# Altium PCB Syn_buckconverter_Altium.PcbDoc
Units mil, origin at the board's own origin, x right, y up, seen from the top; angles counter-clockwise.
Board outline 6000 x 4000 mil, 2 copper layers (Top Layer, Bottom Layer); 7 components, 7 nets, 26 pads, 0 vias.
Unrouted connection lines stored in the file: 4.
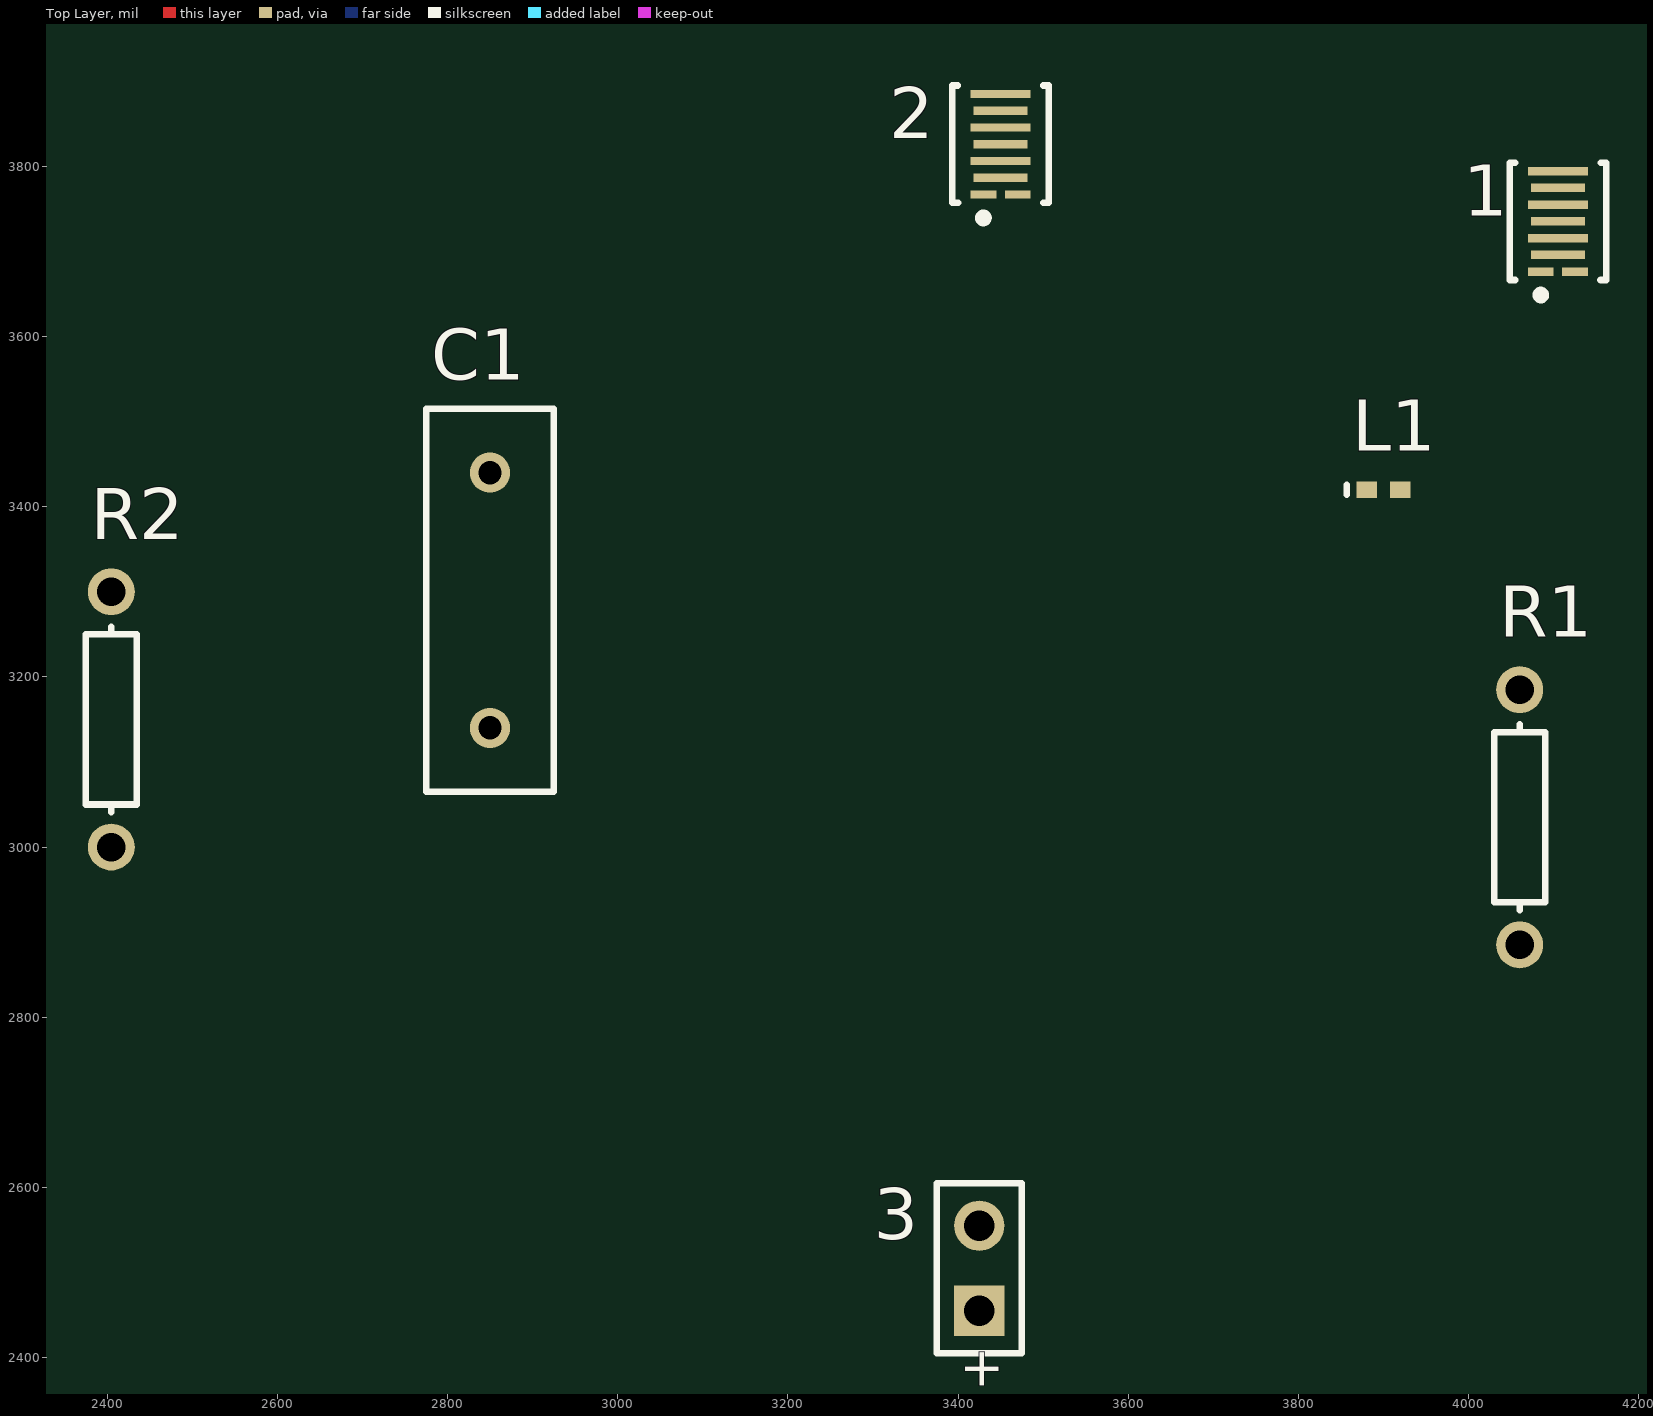
[diagram p0: Top Layer view]
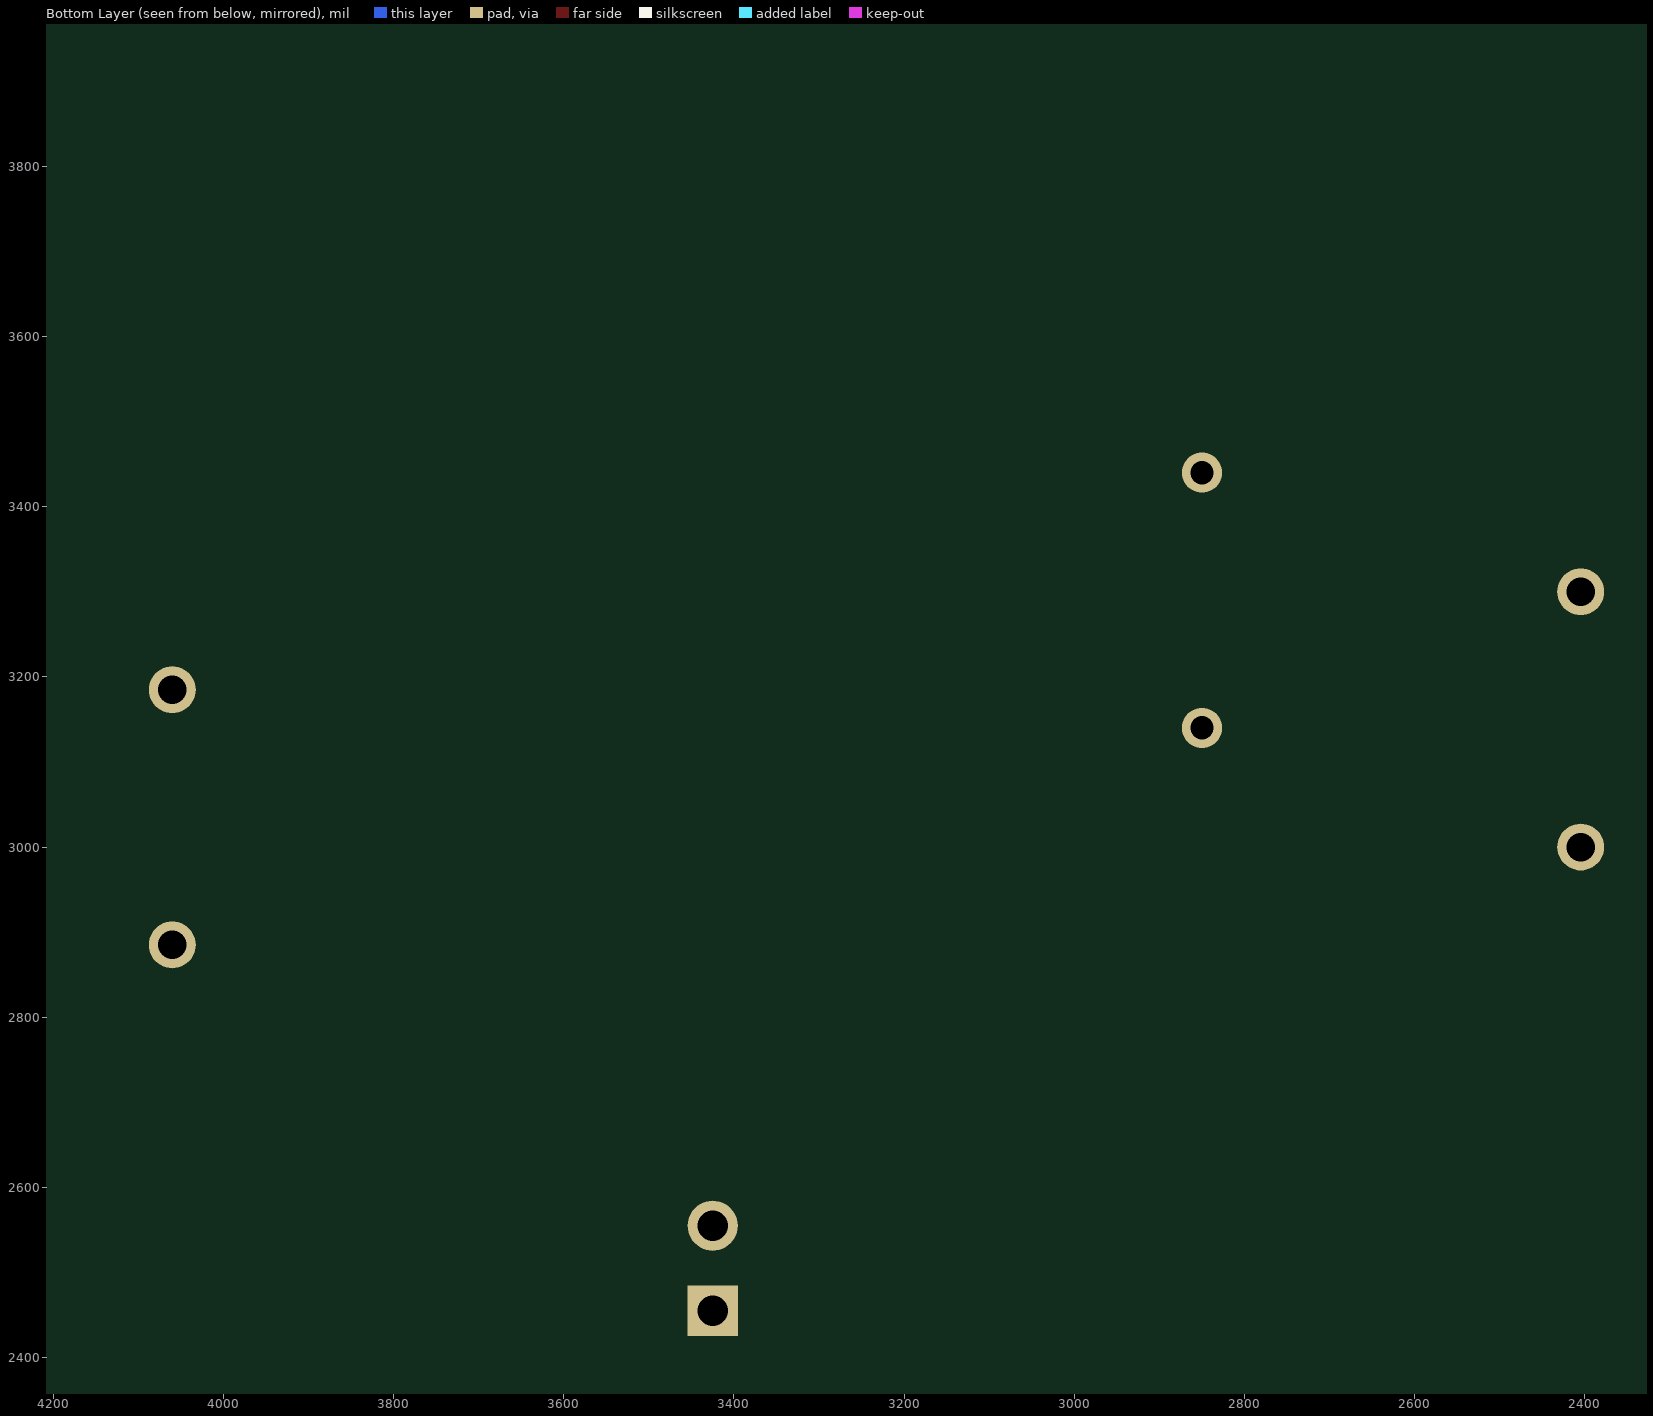
[diagram p1: Bottom Layer view, seen from below]

## Layer stack, top to bottom
Top Solder: solder mask 0.4, Solder Resist, Dk 3.5
Top Layer: signal copper 1.4
Dielectric 1: dielectric 12.6, FR-4, Dk 4.8
Bottom Layer: signal copper 1.4
Bottom Solder: solder mask 0.4, Solder Resist, Dk 3.5

## Board outline
1000,1000 7000,1000 7000,5000 1000,5000

## Design rules (kind name [scope] priority, off if disabled: settings)
Clearance [All] p1: gap=10 ignorepadtopadclearanceinfootprint=FALSE
PolygonConnect [All] p1: connectstyle=Relief reliefconductorwidth=10 reliefentries=4 polygonreliefangle="90 Angle" airgapwidth=10
RoutingVias [All] p1: holewidth=28 width=50 viastyle="Through Hole" minholewidth=28 minwidth=50 maxholewidth=28 maxwidth=50
SolderMaskExpansion [All] p1: expansion=4 istentingtop=FALSE
SupplyNets "Schematic Supply Nets" [InNet('GND')] p1: voltage=0.000
Width [All] p1: maxlimit=10 minlimit=10 preferedwidth=10
30 further rules are at their usual default settings.

## Components (designator, comment, footprint, x,y, rotation, side; value= is the part's Value field where it differs from the comment)
1 "GAN3R2-100CBE" FP-WLCSP8-SOT8072-MFG 4105,3735.32 r90 top
2 "GAN3R2-100CBE_1" FP-WLCSP8-SOT8072-MFG 3450,3825.94 r90 top
3 "Battery" BAT-2 3425,2505 r90 top
C1 "Cap" RAD-0.3 2850,3290 r90 top value=2.71u
L1 "Inductor" 0402-A 3900,3420 r0 top value=2.21u
R1 "Res1" AXIAL-0.3 4060,3035 r90 top value=9.21
R2 "Res1" AXIAL-0.3 2405,3150 r90 top value=0.0914

## Footprints (in the part's own frame and the unit in brackets; to place one, negate y for a bottom-side part, rotate by r counter-clockwise, add the part's x,y. Pads: shape width x height; smd on the part's side, far side on the other; paste and mask are expansions set on the pad)
0402-A [mm] "Chip Inductor, Body 1.0x0.5mm, IPC High Density"
  rect 0.6x0.5 smd: 1(-0.5,0) 2(0.5,0)
  silkscreen extent -1.1,-0.15 -1.1,0.15, body extent -0.55,-0.3 0.55,0.3, height 0.55
AXIAL-0.3 [mm] "Axial Device, Thru-Hole; 2 Leads; 0.3 in Pin Spacing"
  round 1.4 hole 0.85: 1(-3.81,0) 2(3.81,0)
  silkscreen extent -2.77,-0.76 2.77,0.76
BAT-2 [mm] "Battery; 2 Leads"
  rect 1.5x1.5 hole 0.9: 1(-1.27,0)
  round 1.5 hole 0.9: 2(1.27,0)
  silkscreen extent -2.54,-1.27 2.54,1.27
FP-WLCSP8-SOT8072-MFG [mm]
  rect 0.25x0.77 smd paste-1000 mask+0: 1(-1.5,0.512) 2(-1.5,-0.513)
  rect 0.25x1.62 smd paste-1000 mask+0: 3(-1,0) 5(0,0) 7(1,0)
  rect 0.25x1.8 smd paste-1000 mask+0: 4(-0.5,0) 6(0.5,0) 8(1.5,0)
  silkscreen extent -2.32,-1.44 1.75,1.44, body extent -1.85,-1.17 1.85,1.17, height 0.25
RAD-0.3 [mm] "Radial Cap, Thru-Hole; 2 Leads; 0.3 in Pin Spacing"
  round 1.2 hole 0.7: 1(-3.81,0) 2(3.81,0)
  silkscreen extent -5.71,-1.91 5.71,1.91

## Part data
1: "GAN3R2-100CBE                                                                       100 V, 3.2 mOhm Gallium Nitride (GaN) FET in a 3.5 mm x 2.13 mm Wafer Level Chip", Continuous Drain Current (ID)=60A, Drain to Source Breakdown Voltage=100V, Drain to Source Resistance=2.4mΩ, Gate to Source Voltage (Vgs)=-4V, Max Junction Temperature (Tj)=150°C, Min Operating Temperature=-40°C, Power Dissipation=394W, Drain to Source Voltage (Vdss)=100V, Height=464µm, Max Operating Temperature=150°C, MPN=GAN3R2-100CBE, NexarPartId=136220986, Number of Channels=1
2: library part GAN3R2-100CBE, "GAN3R2-100CBE                                                                       100 V, 3.2 mOhm Gallium Nitride (GaN) FET in a 3.5 mm x 2.13 mm Wafer Level Chip", Continuous Drain Current (ID)=60A, Drain to Source Breakdown Voltage=100V, Drain to Source Resistance=2.4mΩ, Gate to Source Voltage (Vgs)=-4V, Max Junction Temperature (Tj)=150°C, Min Operating Temperature=-40°C, Power Dissipation=394W, Drain to Source Voltage (Vdss)=100V, Height=464µm, Max Operating Temperature=150°C, MPN=GAN3R2-100CBE, NexarPartId=136220986, Number of Channels=1
3: "Multicell Battery", LatestRevisionDate=17-Jul-2002, LatestRevisionNote="Re-released for DXP Platform.", PackageDescription="Battery; 2 Leads", PackageReference=BAT-2, Published=24-Mar-1999, Publisher="Altium Limited"
C1: "Capacitor", LatestRevisionDate=17-Jul-2002, LatestRevisionNote="Re-released for DXP Platform.", PackageDescription="Radial Cap, Thru-Hole; 2 Leads; 0.3 in Pin Spacing", PackageReference=RAD-0.3, Published=8-Jun-2000, Publisher="Altium Limited"
R1 R2: "Resistor", LatestRevisionDate=17-Jul-2002, LatestRevisionNote="Re-released for DXP Platform.", PackageDescription="Axial Device, Thru-Hole; 2 Leads; 0.3 in Pin Spacing", PackageReference=AXIAL-0.3, Published=8-Jun-2000, Publisher="Altium Limited"
L1: Code_IEC=1005, Code_JEITA=0402, LatestRevisionDate=29-May-2009, LatestRevisionNote="IPC-7351 Footprint Added.", PackageDescription="Chip Inductor", PackageReference=0402-A, Published=8-Jun-2000, Publisher="Altium Limited"

## Nets (pads, with @x,y where several pads share a name; then routed paths per layer and width w, separated by ;. In a path a pad name is that pad's centre, name@x,y a point inside that pad or via, vN(x,y) a via of type N, cw(c..) or ccw(c..) an arc to the next point about the centre after c; other vN are vias at no path point)
GND: 3.1 C1.1 R1.1
Net1_D: L1.1
Net1_G: R2.2
Net1_S: 3.2
Net2_G: 
NetC1_2: C1.2 L1.2 R1.2
NetR2_1: R2.1
pads on no net: 1.1 1.2 1.3 1.4 1.5 1.6 1.7 1.8 2.1 2.2 2.3 2.4 2.5 2.6 2.7 2.8

## Text inside footprints (layer, text, board x,y; h text height)
3: Top Overlay "+" at 3447.72,2360.51 h45.28 r90